# Altium PCB 数粒机发射板12通道发射板动态补光.PcbDoc
Units mil, origin at the board's own origin, x right, y up, seen from the top; angles counter-clockwise.
Board outline 12834.65 x 2362.2 mil, 4 copper layers (TopLayer, MidLayer1, MidLayer2, BottomLayer); 138 components, 115 nets, 470 pads, 68 vias.
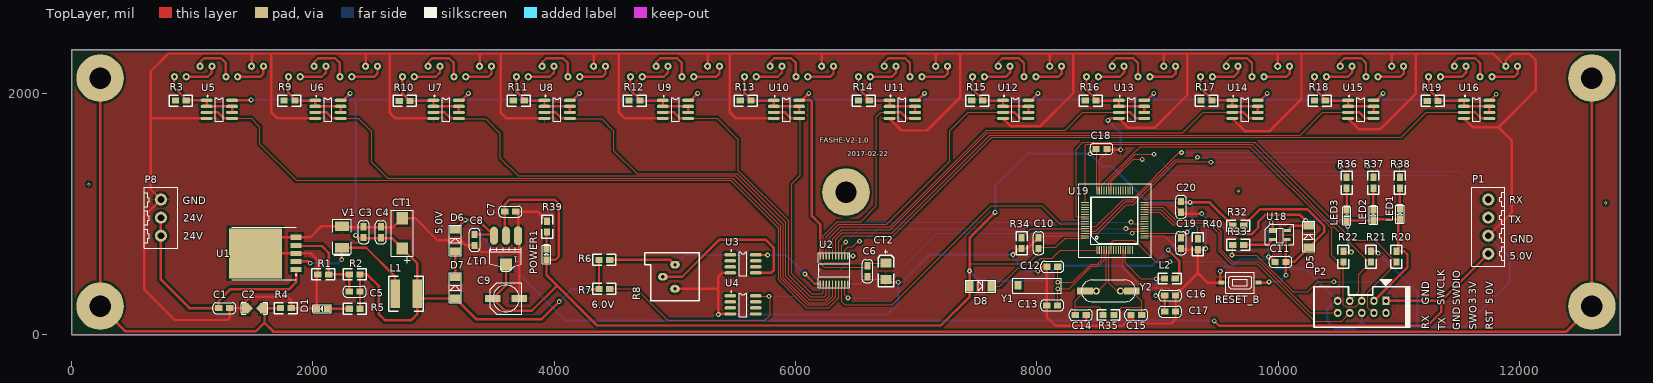
[diagram p0: TopLayer view]
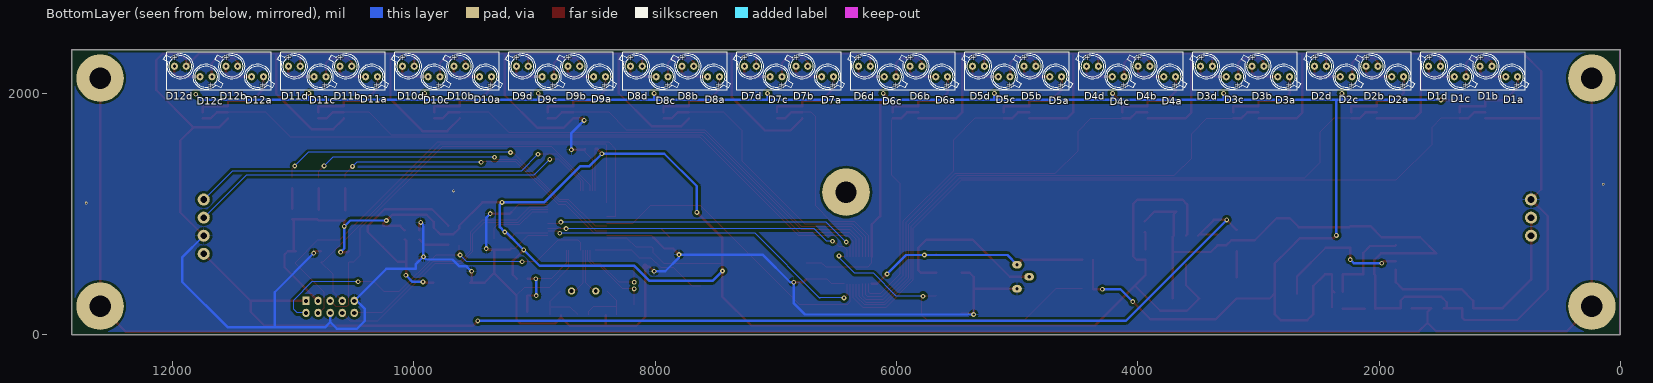
[diagram p1: BottomLayer view, seen from below]

## Layer stack, top to bottom
TopLayer: signal copper 1.4
Dielectric: core 12.6, FR-4, Dk 4.8
MidLayer1: signal copper 1.4
Dielectric: dielectric 12.6, FR-4, Dk 4.8
MidLayer2: signal copper 1.4
Dielectric: dielectric 12.6, FR-4, Dk 4.8
BottomLayer: signal copper 1.4

## Board outline
0,0 12834.65,0 12834.65,2362.2 0,2362.2

## Design rules (kind name [scope] priority, off if disabled: settings)
Clearance Clearance_1 [Inpolygon] p1: gap=20
Clearance [All] p2: gap=7.87
PolygonConnect [All] p1: connectstyle=Relief reliefconductorwidth=10 reliefentries=4 polygonreliefangle="90 Angle"
RoutingLayers [All] p1: top layer_v5=TRUE mid layer 1_v5=FALSE mid layer 2_v5=FALSE bottom layer_v5=TRUE
RoutingVias RoutingVias_1 [All] p1: holewidth=20 width=40 viastyle="Through Hole" minholewidth=20 minwidth=40 maxholewidth=20 maxwidth=40
SilkscreenOverComponentPads [All] p1: minsilkscreentomaskgap=10
SolderMaskExpansion [All] p1: expansion=4
TestPointUsage [All] p1: valid=0 allowmultiple=FALSE
Testpoint [(IsPad And (OnTopLayer Or OnBottomLayer))] p1: side=3 testpointundercomponent=TRUE minsize=40 maxsize=100 preferedsize=60 minholesize=20 maxholesize=40 preferedholesize=32 testpointgrid=1 style=297 order=0123456789
Width [All] p1: maxlimit=150 minlimit=8 preferedwidth=8
22 further rules are at their usual default settings.

## Components (designator, comment, footprint, x,y, rotation, side; value= is the part's Value field where it differs from the comment)
C1 "0.1uF" 0805C 1220,220 r0 top
C2 "102/2KV" 0805CC 1580,220 r180 top
C3 "10uF" 0805C 2420,805 r90 top
C4 "104" 0805C 2562,894 r270 top
C5 "3.3nf" 0805C 2390,356 r180 top
C6 "104" 0805C 6595,481 r90 top
C7 "104" 0805C 3680,1020 r180 top
C8 "104" 0805C 3340,740 r90 top
C9 "10SEV100M6.3X5.5" CC6.56.5 3600,300 r0 top
C10 "104" 0805C 8013,804.13 r270 top
C11 "10uf" 0805C 9973,604.13 r0 top
C12 "10p" 0805C 8083,563 r0 top
C13 "10p" 0805C 8081,243 r0 top
C14 "22p" 0805C 8408,163.13 r180 top
C15 "22p" 0805C 8779,163 r0 top
C16 "104" 0805C 9058,325 r0 top
C17 "104" 0805C 9058,191 r0 top
C18 "104" 0805C 8580,1540 r180 top
C19 "104" 0805C 9193,804.13 r270 top
C20 "104" 0805C 9193,1104.13 r270 top
CT1 "100uF/16V" CT7343 2740,840 r90 top
CT2 "10uF/16V" 3528 6748,593 r90 top
D1 "封装0805" LED-0805 2120,220 r180 top
D1a "EL-1KL3" EL-1KL3 851.38,2137.8 r0 bottom
D1b "EL-1KL3" EL-1KL3 1162.79,2224.41 r180 bottom
D1c "EL-1KL3" EL-1KL3 1278.15,2137.8 r0 bottom
D1d "EL-1KL3" EL-1KL3 1589.57,2224.41 r180 bottom
D2a "EL-1KL3" EL-1KL3 1796.26,2137.8 r0 bottom
D2b "EL-1KL3" EL-1KL3 2107.68,2224.41 r180 bottom
D2c "EL-1KL3" EL-1KL3 2223.03,2137.79 r0 bottom
D2d "EL-1KL3" EL-1KL3 2534.45,2224.41 r180 bottom
D3a "EL-1KL3" EL-1KL3 2741.14,2137.79 r0 bottom
D3b "EL-1KL3" EL-1KL3 3052.56,2224.41 r180 bottom
D3c "EL-1KL3" EL-1KL3 3167.91,2137.79 r0 bottom
D3d "EL-1KL3" EL-1KL3 3479.33,2224.41 r180 bottom
D4a "EL-1KL3" EL-1KL3 3686.02,2137.79 r0 bottom
D4b "EL-1KL3" EL-1KL3 3997.44,2224.41 r180 bottom
D4c "EL-1KL3" EL-1KL3 4112.8,2137.79 r0 bottom
D4d "EL-1KL3" EL-1KL3 4424.21,2224.41 r180 bottom
D5 "1N5822/1206" D1206 10253,724.13 r90 top
D5a "EL-1KL3" EL-1KL3 4630.9,2137.79 r0 bottom
D5b "EL-1KL3" EL-1KL3 4942.32,2224.41 r180 bottom
D5c "EL-1KL3" EL-1KL3 5057.68,2137.79 r0 bottom
D5d "EL-1KL3" EL-1KL3 5369.09,2224.41 r180 bottom
D6 "1N5822/1206" D1206 3180,691.27 r90 top
D6a "EL-1KL3" EL-1KL3 5575.79,2137.79 r0 bottom
D6b "EL-1KL3" EL-1KL3 5887.2,2224.41 r180 bottom
D6c "EL-1KL3" EL-1KL3 6002.56,2137.79 r0 bottom
D6d "EL-1KL3" EL-1KL3 6313.98,2224.41 r180 bottom
D7 "1N5822/1206" D1206 3180,300 r90 top
D7a "EL-1KL3" EL-1KL3 6520.67,2137.79 r0 bottom
D7b "EL-1KL3" EL-1KL3 6832.09,2224.41 r180 bottom
D7c "EL-1KL3" EL-1KL3 6947.44,2137.79 r0 bottom
D7d "EL-1KL3" EL-1KL3 7258.86,2224.41 r180 bottom
D8 "1N5822/1206" D1206 7444,400 r0 top
D8a "EL-1KL3" EL-1KL3 7465.55,2137.79 r0 bottom
D8b "EL-1KL3" EL-1KL3 7776.97,2224.41 r180 bottom
D8c "EL-1KL3" EL-1KL3 7892.32,2137.79 r0 bottom
D8d "EL-1KL3" EL-1KL3 8203.74,2224.41 r180 bottom
D9a "EL-1KL3" EL-1KL3 8410.43,2137.79 r0 bottom
D9b "EL-1KL3" EL-1KL3 8721.85,2224.41 r180 bottom
D9c "EL-1KL3" EL-1KL3 8837.2,2137.79 r0 bottom
D9d "EL-1KL3" EL-1KL3 9148.62,2224.41 r180 bottom
D10a "EL-1KL3" EL-1KL3 9355.31,2137.79 r0 bottom
D10b "EL-1KL3" EL-1KL3 9666.73,2224.41 r180 bottom
D10c "EL-1KL3" EL-1KL3 9782.09,2137.79 r0 bottom
D10d "EL-1KL3" EL-1KL3 10093.5,2224.41 r180 bottom
D11a "EL-1KL3" EL-1KL3 10300.2,2137.79 r0 bottom
D11b "EL-1KL3" EL-1KL3 10611.61,2224.41 r180 bottom
D11c "EL-1KL3" EL-1KL3 10726.97,2137.79 r0 bottom
D11d "EL-1KL3" EL-1KL3 11038.39,2224.41 r180 bottom
D12a "EL-1KL3" EL-1KL3 11245.08,2137.79 r0 bottom
D12b "EL-1KL3" EL-1KL3 11556.5,2224.41 r180 bottom
D12c "EL-1KL3" EL-1KL3 11671.85,2137.79 r0 bottom
D12d "EL-1KL3" EL-1KL3 11983.27,2224.41 r180 bottom
L1 "33uH2A" 6045 2680,340 r0 top
L2 "100uH" 0805 9146,465 r180 top
LED1 "封装0805" LED-0805 11012,954 r90 top
LED2 "封装0805" LED-0805 10793,945 r90 top
LED3 "封装0805" LED-0805 10572,942 r90 top
P1 "4-Pin 3.81mm" con4 11740,1120 r270 top
P2 "5X2 Pin 2.54mm" idc-10-b 10892,280 r180 top
P8 "3Pin 3.81mm" CON3 740,820 r0 top
POWER1 "封装0805" LED-0805 3940,620 r90 top
R1 "1K %1" 0805R 2040,500 r0 top
R2 "4K %1" 0805R 2300,500 r0 top
R3 "50K 1%" 0805R 860,1940 r0 top
R4 "1M" 0805R 1820,220 r180 top
R5 "10K" 0805R 2300,215 r0 top
R6 "2K" 0805R 4460,620 r180 top
R7 "2.5K" 0805R 4460,380 r180 top
R8 "3362P-1-103" VR4 5000,380 r90 top
R9 "50K 1%" 0805R 1760,1940 r0 top
R10 "50K 1%" 0805R 2714,1938 r0 top
R11 "50K 1%" 0805R 3660,1940 r0 top
R12 "50K 1%" 0805R 4620,1940 r0 top
R13 "50K 1%" 0805R 5540,1940 r0 top
R14 "50K 1%" 0805R 6520,1940 r0 top
R15 "50K 1%" 0805R 7460,1940 r0 top
R16 "50K 1%" 0805R 8400,1940 r0 top
R17 "50K 1%" 0805R 9360,1940 r0 top
R18 "50K 1%" 0805R 10300,1940 r0 top
R19 "50K 1%" 0805R 11234,1938 r0 top
R20 "10K" 0805R 10978.67,601.44 r90 top
R21 "10K" 0805R 10768.67,601.44 r90 top
R22 "10K" 0805R 10538.67,601.44 r90 top
R32 "1M" 0805R 9713,904.13 r180 top
R33 "1M" 0805R 9713,744.13 r180 top
R34 "100K" 0805R 7873,804.13 r270 top
R35 "1M" 0805R 8548,163.13 r0 top
R36 "1M" 0805R 10567,1304.01 r270 top
R37 "1M" 0805R 10787,1304.01 r270 top
R38 "1M" 0805R 11007,1304.01 r270 top
R39 "1M" 0805R 3940,940 r270 top
R40 "100K" 0805R 9333,704.13 r90 top
RESET_B "3*6*2.5 白色按钮轻触开关 两脚 2P" button_2 9530,432 r0 top
U1 "LM2596S-ADJ" TO-263 1860,540 r90 top
U2 "AD8804ARUZ" tssop20 6320,540 r90 top
U3 "LM336MX-5.0" sop8 5460,660 r0 top
U4 "LM336MX-2.5" sop8 5460,320 r0 top
U5 "TLV2472AID" sop8 1120,1940 r0 top
U6 "TLV2472AID" sop8 2020,1940 r0 top
U7 "TLV2472AID" sop8 3000,1940 r0 top
U8 "TLV2472AID" sop8 3920,1940 r0 top
U9 "TLV2472AID" sop8 4900,1940 r0 top
U10 "TLV2472AID" sop8 5820,1940 r0 top
U11 "TLV2472AID" sop8 6780,1940 r0 top
U12 "TLV2472AID" sop8 7720,1940 r0 top
U13 "TLV2472AID" sop8 8680,1940 r0 top
U14 "TLV2472AID" sop8 9620,1940 r0 top
U15 "TLV2472AID" sop8 10580,1940 r0 top
U16 "TLV2472AID" sop8 11540,1940 r0 top
U17 "AMS1117-3.3" AMS1117 3700,820 r180 top
U18 "MAX811T/SOT143" MAX811T 9953,864.13 r0 top
U19 "STM32F103RCT6" TQ64 8660,940 r90 top
V1 "SK210B" 1812DT 2240,720 r90 top
Y1 "HC-49DIP/32.768KHz" 32.768khz 8173,424.13 r180 top
Y2 "HC-49SMD/8.000MHz" CRYSTAL_SMD 8491,361 r270 top

## Footprints (in the part's own frame and the unit in brackets; to place one, negate y for a bottom-side part, rotate by r counter-clockwise, add the part's x,y. Pads: shape width x height; smd on the part's side, far side on the other; paste and mask are expansions set on the pad)
32.768khz [mm]
  round 1 hole 0.5: 1(0,-0.254) 2(0,1.143)
  rect 1.5x1.8 smd: 3(8.382,0.381)
  silkscreen extent -0.76,-1.14 9.53,2.03
0805 [mil]
  rect 60x50 smd: 1(0,-0.06) 2(90,-0.06)
  silkscreen extent -50,-45 140,45
0805C [mil]
  rect 60x50 smd: 1(0,0) 2(90,0)
  silkscreen extent -50,-45 140,45
0805CC [mil]
  rect 56x86.61 smd mask+0: 1(-10,2) 2(141,2)
  rect 56x56 smd rot 45 mask+0: 1(13,2) 2(117,2)
  silkscreen extent -44,-48 175,52
0805R [mil]
  rect 60x50 smd: 1(0,0) 2(90,0)
  silkscreen extent -50,-45 140,45
1812DT [mm]
  rect 2x3 smd: 1(4.496,0) 2(0,0)
  silkscreen extent -1.63,-1.95 5.99,1.97
3528 [mil]
  rect 75x90 smd: 1(0,0) 2(-135,0)
  silkscreen extent -195,-65 110,65
6045 [mm]
  rect 2x6 smd: 1(0,0) 2(4.699,0)
  silkscreen extent -1.27,-3.68 5.97,3.68
AMS1117 [mil]
  oct 65x150 smd: 1(0.03,-0.06)
  oval 65x150 smd: 2(100.03,-0.06) 3(200.03,-0.06)
  rect 100x100 smd: 4(100.03,239.94)
  silkscreen extent -26,100 234,293
button_2 [mm]
  rect 1.3x0.8 smd: 1(0,0) 2(7.8,0)
  silkscreen extent 0.9,-2.2 6.9,2.2
CC6.56.5 [mm]
  rect 3.2x1.5 smd: 1(-2.794,0) 2(2.8,0)
  silkscreen extent -3.3,-3.3 3.3,3.3
CON3 [mil]
  round 100 hole 56: 1(0,0) 2(0,150) 3(0,300)
  silkscreen extent -138,-102 138,402
con4 [mil]
  round 100 hole 56: 1(0,0) 2(150,0) 3(300,0) 4(450,0)
  silkscreen extent -102,-138 552,138
CRYSTAL_SMD [mil]
  rect 60x130 smd: 1(-0.46,-93.11) 2(-0.46,294.61)
  round 60 hole 32: 1(0,0) 2(-0.43,200.43)
  silkscreen extent -93,-123 88,327
CT7343 [mil]
  rect 102x95 smd: 1(-126,0) 2(126,0)
  silkscreen extent -250,-91 190,91
D1206 [mm]
  rect 1.6x2.2 smd: 1(0,0) 2(4.5,0)
  silkscreen extent -0.91,-1.24 5.46,1.27
EL-1KL3 [mm]
  round 1.5 hole 0.65: 1(0,0) 2(2.49,0)
  silkscreen extent -2.31,-2.7 3.93,2.7
idc-10-b [mil]
  rect 60x70 hole 35: 1(0,0)
  oval 60x70 hole 35: 2(0,100) 3(100,0) 4(100,100) 5(200,0) 6(200,100) 7(300,0) 8(300,100) 9(400,0) 10(400,100)
  silkscreen extent -196,-175 596,218
LED-0805 [mil]
  rect 55.12x50 smd: 1(0.99,5) 2(88,5)
  silkscreen extent -31,-30 130,40
MAX811T [mil]
  rect 63x40 smd: 1(0,0)
  rect 63x25 smd: 2(0,-75)
  rect 59.05x25 smd: 3(120,-75) 4(122.05,0)
  silkscreen extent -60,-120 175,50
sop8 [mm]
  oval 2.5x0.7 smd: 1(-0.037,0.051) 2(-0.037,-1.219) 3(-0.037,-2.489) 4(-0.037,-3.759) 5(5.32,-3.759) 6(5.32,-2.489) 7(5.32,-1.219) 8(5.32,0.051)
  silkscreen extent 0.04,-4.35 3.42,1.08
TO-263 [mil]
  rect 42x90 smd: 1(0,0) 2(66.93,0) 3(133.86,0) 4(200.79,0) 5(267.72,0)
  rect 414x440 smd: 6(133.86,336)
  silkscreen extent -85,-5 352,531
TQ64 [mm]
  rect 1.7x0.22 smd: 1(-6.062,4.151)
  oval 1.7x0.22 smd: 2(-6.062,3.651) 3(-6.062,3.151) 4(-6.062,2.651) 5(-6.062,2.151) 6(-6.062,1.651) 7(-6.062,1.151) 8(-6.062,0.651) 9(-6.062,0.151) 10(-6.062,-0.349) 11(-6.062,-0.849) 12(-6.062,-1.349) 13(-6.062,-1.849) 14(-6.062,-2.349) 15(-6.062,-2.849) 16(-6.062,-3.349) 33(6.438,-3.349) 34(6.438,-2.849) 35(6.438,-2.349) 36(6.438,-1.849) 37(6.438,-1.349) 38(6.438,-0.849) 39(6.438,-0.349) 40(6.438,0.151) 41(6.438,0.651) 42(6.438,1.151) 43(6.438,1.651) 44(6.438,2.151) 45(6.438,2.651) 46(6.438,3.151) 47(6.438,3.651) 48(6.438,4.151)
  oval 0.22x1.7 smd: 17(-3.562,-5.849) 18(-3.062,-5.849) 19(-2.562,-5.849) 20(-2.062,-5.849) 21(-1.562,-5.849) 22(-1.062,-5.849) 23(-0.562,-5.849) 24(-0.062,-5.849) 25(0.438,-5.849) 26(0.938,-5.849) 27(1.438,-5.849) 28(1.938,-5.849) 29(2.438,-5.849) 30(2.938,-5.849) 31(3.438,-5.849) 32(3.938,-5.849) 49(3.938,6.651) 50(3.438,6.651) 51(2.938,6.651) 52(2.438,6.651) 53(1.938,6.651) 54(1.438,6.651) 55(0.938,6.651) 56(0.438,6.651) 57(-0.062,6.651) 58(-0.562,6.651) 59(-1.062,6.651) 60(-1.562,6.651) 61(-2.062,6.651) 62(-2.562,6.651) 63(-3.062,6.651) 64(-3.562,6.651)
  silkscreen extent -7.59,-7.28 7.91,7.96
tssop20 [mm]
  rect 1.3x0.3 smd: 1(-2.992,2.966)
  oval 1.3x0.3 smd: 2(-2.992,2.316) 3(-2.992,1.666) 4(-2.992,1.016) 5(-2.992,0.366) 6(-2.992,-0.284) 7(-2.992,-0.934) 8(-2.992,-1.584) 9(-2.992,-2.234) 10(-2.992,-2.884) 11(2.708,-2.884) 12(2.708,-2.234) 13(2.708,-1.584) 14(2.708,-0.934) 15(2.708,-0.284) 16(2.708,0.366) 17(2.708,1.016) 18(2.708,1.666) 19(2.708,2.316) 20(2.708,2.966)
  silkscreen extent -3.85,-3.26 3.57,3.34
VR4 [mil]
  oval 62x80 hole 28: 1(0,0) 2(100,100) 3(200,0)
  silkscreen extent -100,-200 300,250

## Part data
C1 C3: library part Pro92D1.TMP_105_9
C2 C4 C5 C6 C7 C8 C10 C11 C12 C13 C14 C15 C16 C17 C18 C19 C20: library part CAP
C9: library part CAP, "10S"
CT1 CT2: library part "CAP POL"
D1: library part LED
D1a D1b D1c D1d D2a D2b D2c D2d D3a D3b D3c D3d D4a D4b D4c D4d D5a D5b D5c D5d D6a D6b D6c D6d D7a D7b D7c D7d D8a D8b D8c D8d D9a D9b D9c D9d D10a D10b D10c D10d D11a D11b D11c D11d D12a D12b D12c D12d: library part LED0
D5 D6 D7 D8: library part "DIODE 1N4148/1206", "1N58"
L1: library part Inductor
L2: library part FERRITE
LED1 LED2 LED3: library part "LED_GREEN 0805", "17-215SYGC-S530"
P1: library part "Header 4", "Header"
P2: library part "Header 5X2", "Header, 5"
P8: library part "Header 3", "Header"
POWER1: library part "LED_GREEN 0805", "17-215-SURC-S530"
R1 R2 R3 R4 R5 R6 R7 R9 R10 R11 R12 R13 R14 R15 R16 R17 R18 R19 R20 R21 R22 R32 R33 R34 R35 R36 R37 R38 R39 R40: library part Res2
R8: library part 3362P
RESET_B: library part KEY_M
U1: library part LM2575T5.0(5)
U2: library part AD8804, "12通道 8位 DAC"
U3: library part LM335MX-5.0
U4: library part LM335MX-5.0, "»"
U5 U6 U7 U8 U9 U10 U11 U12 U13 U14 U15 U16: library part AD822, "¼¯³"
U17: library part AMS1117
U18: library part "Power MAX811T"
U19: library part STM32F103RDT6
V1: library part DIODE1
Y1: library part "CRYSTAL 12M HC-49SMD", "HC-49DIP/32"
Y2: library part "CRYSTAL 12M HC-49SMD"

## Free pads (board coordinates)
  round 393.7 hole 177.17: 0(236.22,236.22) 1(236.22,2125.98) 5(12598.43,2125.98) 6(12598.43,236.22)
  round 393.7 hole 177.17 unplated: 2(6417.32,1181.1)

## Via types
v1: diameter 40, hole 20, TopLayer to BottomLayer, 65 vias
v2: diameter 23.62, hole 11.81, TopLayer to BottomLayer, 3 vias

## Nets (pads, with @x,y where several pads share a name; then routed paths per layer and width w, separated by ;. In a path a pad name is that pad's centre, name@x,y a point inside that pad or via, vN(x,y) a via of type N, cw(c..) or ccw(c..) an arc to the next point about the centre after c; other vN are vias at no path point)
ADC0: U19.16
ADC1: U19.15
ADC2: U19.14
ADC3: U19.11
ADC4: U19.10
ADC5: U19.9
ADC6: U19.8
ADC7: U19.27
ADC8: U19.26
ADC9: U19.25
ADC10: U19.24
ADC11: U19.17
BOOT0: R34.1 U19.60 | length 556
  TopLayer w8: R34.1 7947.37,878.5 U19.60
BOOT1: R40.2 U19.28 | length 588
  TopLayer w8: U19.28 9017.7,1016.3 9124,910 9308,910 9333,885 R40.2
DA1: U2.7 U5.3 U5.5 | length 6391.1
  TopLayer w10: U5.5 1488,1792 1560,1720 1560,1580 1860.38,1279.62 5460.38,1279.62 5858,882 5858,454 6088,224 6274,224 6357,307 6357,421.98 U2.7
  TopLayer w20: U5.3 1212.5,1842 1262.5,1792 U5.5
DA2: U2.6 U6.3 U6.5 | length 5509.9
  TopLayer w10: U6.5 2375,1792 2485,1682 2485,1431 2618.5,1297.5 5480.5,1297.5 5878,900 5878,465.72 6096.6,247.13 6263.13,247.13 6331.18,315.18 U2.6
  TopLayer w20: U6.3 2112.5,1842 2162.5,1792 U6.5
DA3: U2.5 U7.3 U7.5 | length 4465.8
  TopLayer w10: U7.5 3211.46,1790 3430,1790 3554,1666 3554,1461 3699.63,1315.37 5498.63,1315.37 5897,917 5897,472 6104,265 6250.28,265 6305.59,320.31 U2.5
  TopLayer w20: U7.3 3092.5,1842 3142.5,1792 U7.5
DA4: U2.4 U8.3 U8.5 | length 3475.9
  TopLayer w10: U8.5 4133.46,1788 4392,1788 4493,1687 4493,1526 4685.76,1333.24 5514.76,1333.24 5918,930 5918,483 6112,289 6249,289 6280,320 U2.4
  TopLayer w20: U8.3 4012.5,1842 4062.5,1792 U8.5
DA5: U2.3 U9.3 U9.5 | length 2502.6
  TopLayer w10: U9.5 5110.46,1793 5349,1793 5525,1617 5525,1359 5941,943 5941,494 6122,313 6236,313 6254.41,331.41 U2.3
  TopLayer w20: U9.3 4992.5,1842 5042.5,1792 U9.5
DA6: U2.2 U10.3 U10.5 | length 1957.8
  TopLayer w10: U10.5 6040,1781.46 6040,1323 5968,1251 5968,504 6132,340 6217,340 6228.82,351.82 U2.2
  TopLayer w20: U10.3 5912.5,1842 5962.5,1792 U10.5
DA7: U2.19 U11.3 U11.5 | length 1810.3
  TopLayer w10: U2.19 6228.82,818.82 6346,936 6538,936 6669,1067 6669,1806 6705,1842 U11.3
  TopLayer w20: U11.3 6872.5,1842 6922.5,1792 U11.5
DA8: U2.18 U12.3 U12.5 | length 2437.4
  TopLayer w10: U2.18 6254.41,813.41 6357,916 6757,916 7279,1438 7279,1692 7429,1842 U12.3
  TopLayer w20: U12.3 7812.5,1842 7862.5,1792 U12.5
DA9: U2.17 U13.3 U13.5 | length 3216.9
  TopLayer w10: U2.17 6280,803 6370,893 6783.72,893 7585.72,1695 8233,1695 8380,1842 U13.3
  TopLayer w20: U13.3 8772.5,1842 8822.5,1792 U13.5
DA10: U2.16 U14.3 U14.5 | length 4126.4
  TopLayer w10: U2.16 6305.59,794.59 6381,870 6786,870 7588,1672 9208,1672 9378,1842 U14.3
  TopLayer w20: U14.3 9712.5,1842 9762.5,1792 U14.5
DA11: U2.15 U15.3 U15.5 | length 5061.4
  TopLayer w10: U2.15 6331.18,789.18 6387,845 6800,845 7609,1654 10182,1654 10370,1842 U15.3
  TopLayer w20: U15.3 10672.5,1842 10722.5,1792 U15.5 U15.5@10786.82,1794.63
DA12: U2.14 U16.3 U16.5 | length 5984.2
  TopLayer w10: U2.14 6356.77,775.77 6399,818 6807,818 7624,1635 11019,1635 11226,1842 U16.3
  TopLayer w20: U16.3 11632.5,1842 11682.5,1792 U16.5
GND: C1.2 C2.2 C3.2 C4.1 C6.1 C7.1 C8.1 C9.2 C10.1 C11.1 C12.1 C13.1 C14.1 C15.1 C16.2 C17.2 C18.1 C19.2 C20.2 CT1.2 CT2.2 D1.2 D1d.2 D2d.2 D3d.2 D4d.2 D5d.2 D6d.2 D7d.2 D8d.2 D9d.2 D10d.2 D11d.2 D12d.2 P1.3 P2.6 P2.9 P8.3 R1.1 R4.1 R8.1 R21.2 R34.2 R39.1 R40.1 RESET_B.1 U1.3 U1.5 U2.10 U3.4 U4.4 U5.4 U6.4 U7.4 U8.4 U9.4 U10.4 U11.4 U12.4 U13.4 U14.4 U15.4 U16.4 U17.1 U18.1 U19.12 U19.18 U19.31 U19.47 U19.63 V1.1 | length 48757.8
  TopLayer w8: U2.10 6536.2,422.2 6572,458 CT2.2 ; C10.1 8028.32,819.45 U19.63 U19.63@8398.6,819 ; U19.47 8516.26,1449.26 8580,1513 C18.1 ; U19.12 8713.11,552.89 8875,391 9082,391 C16.2 ; U19.18 9056.55,819.45 9161.87,714.13 C19.2 ; U19.31 9131.78,1075.35 C20.2
  TopLayer w20: U5.4 655,1792 ; C2.2@1439,218 C2.2@1439,220 ; C2.2@1463,218 1461,220 C2.2@1439,220 ; D1d.2 1491.53,2329 ; 1655,2327 1655,1842 1705,1792 U6.4 ; D2d.2 2436.42,2328 ; 2635,2328 2635,1842 2685,1792 U7.4 ; D3d.2 3381.3,2327 ; C9.2 3710.24,690 ; U8.4 3605,1792 3555,1842 3555,2330 ; R39.1 3860,1020 C7.1 3699.97,1000.03 U17.1 3710.24,809.8 3710.24,690 ; D4d.2 4326.18,2328 ; 4535,2327 4535,1842 4585,1792 U9.4 ; R8.1 5355,380 5360,385 ; D5d.2 5271.06,2328 ; U4.4 5365,172 v1(5360,167) 5360,385 ; U3.4 5392,512 5360,480 5360,385 ; U10.4 5505,1792 5455,1842 5455,2330 ; D6d.2 6215.94,2329 ; CT2.2 6771,435 v1(6851,435) ; U11.4 6878.54,1692 7088,1692 7363,1967 7363,2330 ; D7d.2 7160.83,2327 ; U12.4 7781.54,1729 8029,1729 8301,2001 8301,2330 ; v1(7801,664) 7851.13,714.13 R34.2 7923,714.13 C10.1 ; v1(8008,526) 8045,563 C12.1 ; C12.1@8081,561 C13.1 8081,148 8156.13,72.87 8706.87,72.87 C15.1@8779,145 ; D8d.2 8105.71,2328 ; 8408,72.87 C14.1 ; C18.1 8588,1532 v1(8693,1532) ; v1(8588,1776) 8604,1792 U13.4 8754.54,1716 8977,1716 9245,1984 9245,2330 ; C15.1 C15.1@8779,145 ; D9d.2 9050.59,2328 ; C19.2 9203,704.13 R40.1 ; C20.2 9204.13,1003 v1(9366,1003) ; v1(9398,713) 9389.13,704.13 R40.1 ; v1(9520,525) 9520,442 RESET_B.1 9411,432 9333,510 ; U14.4 9723,1687.54 9927.54,1687.54 10192,1952 10192,2330 ; v1(9919,646) 9931.13,646 C11.1 ; v1(9942,931) 9953,920 U18.1 ; D10d.2 9995.47,2328 ; U15.4 10666.54,1704 10847,1704 11138,1995 11138,2330 ; R21.2 10812.56,691.44 v1(10828,676) ; D11d.2 10940.35,2330 ; U16.4 11612.54,1718 11825,1718 ; P1.3 11934,1014 11934,1609 11825,1718 ; 655,1792 655,1205 P8.3 601,981 601,376 855,122 1293,122 1310,139 C1.2 C2.2@1439,220 ; 655,1792 655,2183 802,2330 3555,2330 ; C2.2@1439,220 1439,269 1486,316 1787,316 1820,283 R4.1 2027,220 D1.2 2032,492 R1.1 2040,618 1984.14,673.86 U1.3 1524,673.86 1657.86,807.72 U1.5 1978.28,807.72 2067.57,897 V1.1 2247,890 2420,890 2664,890 CT1.2 2847,966 3030,783 3224,783 3267,740 C8.1 3395,685 3705.24,685 3710.24,690 ; 3555,2330 5455,2330 ; 5455,2330 7363,2330 ; 7363,2330 8301,2330 ; 8301,2330 9245,2330 ; C15.1@8779,145 8779,142 8828,93 9116,93 9148,125 C17.2 C16.2 9333,510 ; 9245,2330 10192,2330 ; 9333,510 R40.1 ; 10192,2330 10940.35,2330 ; 10940.35,2330 11138,2330 ; 11138,2330 11779.65,2330 D12d.2 11885.24,2276.24 11936,2327 12082,2327 12134,2275 12134,2027 11825,1718
  TopLayer w50: C12.1@8081,561 C12.1
  BottomLayer w20: v1(5360,167) 6756,167 6851,262 v1(6851,435) 6879,435 7108,664 v1(7801,664) 7801,640 7915,526 v1(8008,526) ; v1(8588,1776) 8693,1671 v1(8693,1532) ; v1(9366,1003) 9398,971 v1(9398,713) ; v1(9520,525) 9561,566 9621,566 9678,623 9897,623 v1@9919.5,645.5 ; v1(9919,646) v1@9919.5,645.5 ; v1(9942,931) 9920,909 9920,646 v1@9919.5,645.5 ; P2.6 10692,104 ; v1(10828,676) 11152,352 11152,60 ; P1.3 11919,641 11919,439 11540,60 11152,60 ; v1@9919.5,645.5 9984,581 9984,546 10226,546 P2.9 10471,280 10404,213 10404,116 10471,49 10637,49 10692,104 ; 10692,104 10736,60 11152,60
  other v2: 12714,1090 9669,1192 142,1247
LED1: R38.1 U19.59 | length 2990.4
  TopLayer w8: U19.59 8492.19,898.19 8714,1120 8789,1120 9179,1510 v1(9198,1510) ; v1(10986,1398) 11007,1377 R38.1
  BottomLayer w8: v1(9198,1510) 10874,1510 v1(10986,1398)
LED2: R37.1 U19.61 | length 2740.1
  TopLayer w8: U19.61 8488.82,858.82 8730,1100 8795,1100 9146,1451 9311,1451 v1(9330,1470) ; v1(10742,1399) 10787,1354 R37.1
  BottomLayer w8: v1(9330,1470) 10671,1470 v1(10742,1399)
LED3: R36.1 U19.62 | length 2487.3
  TopLayer w8: U19.62 8503.13,839.13 8740,1076 8798,1076 9156,1434 9436,1434 v1(9441,1429) ; v1(10507,1395) 10567,1335 R36.1
  BottomLayer w8: v1(9441,1429) 10473,1429 v1(10507,1395)
NetC5_2: C5.2 R1.2 R2.1 U1.4 | length 788.6
  TopLayer w20: U1.4 1865.79,735 1976,735 2074,735 2130,679 R1.2 R2.1 C5.2
NetC12_2: C12.2 U19.3 Y1.1 | length 650.2
  TopLayer w8: C12.2 Y1.1 8298.13,434.13 8448,584 8500,584 8535.95,619.95 U19.3
NetC13_2: C13.2 U19.4 Y1.2 | length 699.8
  TopLayer w8: C13.2 Y1.2@8171,377.13 ; Y1.2 8266.13,379.13 8455.13,568.13 8506.58,568.13 8556,617.55 8556,700.97 U19.4
NetC14_2: C14.2 R35.1 U19.5 Y2.1 | length 872.6
  TopLayer w8: C14.2 8318,233 ; Y2.1@8397.89,361.46 8318,281.57 8318,233 ; Y2.1@8513,364.13 8513,367 8575.32,429.32 U19.5 ; R35.1 8548,196 8511,233 8318,233
NetC15_2: C15.2 R35.2 U19.6 Y2.2 | length 908.8
  TopLayer w8: U19.6 8595,429 8659.44,364.56 Y2.2@8713.43,364.56 ; R35.2 8703.87,229 8869,229 ; Y2.2@8785.61,361.46 8869,278.07 8869,229 ; C15.2 8869,229
NetC16_1: C16.1 C17.1 L2.2 U19.13 | length 901.8
  TopLayer w8: U19.13 8732.8,594.2 8861.94,465.06 L2.2
  TopLayer w20: v1(8984,324) 8985,325 C16.1 C17.1 ; v1(8988,463) 9053.94,463 L2.2
  BottomLayer w20: v1(8984,324) 8984,459 v1(8988,463)
NetD1_1: D1.1 R5.1 | length 181
  TopLayer w20: D1.1 R5.1
NetD1a_2: D1a.2 D1b.1 | length 279.5
  TopLayer w20: D1a.2 1127.8,2137.8 1162.79,2172.79 D1b.1
NetD1b_2: D1b.2 D1c.1 | length 390.2
  TopLayer w20: D1b.2 1064.76,2257.76 1098,2291 1238,2291 1278.15,2250.85 D1c.1
NetD1c_2: D1c.2 D1d.1 | length 284.9
  TopLayer w20: D1c.2 1563.8,2137.8 1589.57,2163.57 D1d.1
NetD2a_2: D2a.2 D2b.1 | length 279.5
  TopLayer w20: D2a.2 2072.68,2137.79 2107.68,2172.79 D2b.1
NetD2b_2: D2b.2 D2c.1 | length 390.2
  TopLayer w20: D2b.2 2009.64,2257.76 2042.88,2291 2182.88,2291 2223.03,2250.85 D2c.1
NetD2c_2: D2c.2 D2d.1 | length 284.9
  TopLayer w20: D2c.2 2508.68,2137.79 2534.45,2163.57 D2d.1
NetD3a_2: D3a.2 D3b.1 | length 279.5
  TopLayer w20: D3a.2 3017.56,2137.79 3052.56,2172.79 D3b.1
NetD3b_2: D3b.2 D3c.1 | length 390.2
  TopLayer w20: D3b.2 2954.53,2257.76 2987.76,2291 3127.76,2291 3167.91,2250.85 D3c.1
NetD3c_2: D3c.2 D3d.1 | length 284.9
  TopLayer w20: D3c.2 3453.56,2137.79 3479.33,2163.57 D3d.1
NetD4a_2: D4a.2 D4b.1 | length 279.5
  TopLayer w20: D4a.2 3962.44,2137.8 3997.44,2172.8 D4b.1
NetD4b_2: D4b.2 D4c.1 | length 390.2
  TopLayer w20: D4b.2 3899.41,2257.76 3932.65,2291 4072.65,2291 4112.8,2250.85 D4c.1
NetD4c_2: D4c.2 D4d.1 | length 284.9
  TopLayer w20: D4c.2 4398.44,2137.8 4424.21,2163.57 D4d.1
NetD5a_2: D5a.2 D5b.1 | length 279.5
  TopLayer w20: D5a.2 4907.32,2137.79 4942.32,2172.79 D5b.1
NetD5b_2: D5b.2 D5c.1 | length 390.2
  TopLayer w20: D5b.2 4844.29,2257.76 4877.53,2291 5017.53,2291 5057.68,2250.85 D5c.1
NetD5c_2: D5c.2 D5d.1 | length 284.9
  TopLayer w20: D5c.2 5343.32,2137.79 5369.09,2163.57 D5d.1
NetD6_1: D6.1 D7.2 | length 214.1
  TopLayer w20: D7.2 D6.1
NetD6a_2: D6a.2 D6b.1 | length 279.5
  TopLayer w20: D6a.2 5852.21,2137.8 5887.2,2172.8 D6b.1
NetD6b_2: D6b.2 D6c.1 | length 390.2
  TopLayer w20: D6b.2 5789.17,2257.76 5822.41,2291 5962.41,2291 6002.56,2250.85 D6c.1
NetD6c_2: D6c.2 D6d.1 | length 284.9
  TopLayer w20: D6c.2 6288.21,2137.8 6313.98,2163.57 D6d.1
NetD7a_2: D7a.2 D7b.1 | length 279.5
  TopLayer w20: D7a.2 6797.09,2137.79 6832.09,2172.79 D7b.1
NetD7b_2: D7b.2 D7c.1 | length 390.2
  TopLayer w20: D7b.2 6734.05,2257.76 6767.29,2291 6907.29,2291 6947.44,2250.85 D7c.1
NetD7c_2: D7c.2 D7d.1 | length 284.9
  TopLayer w20: D7c.2 7233.09,2137.79 7258.86,2163.57 D7d.1
NetD8_2: D8.2 U19.1 | length 1000.2
  TopLayer w8: D8.2 7693,400 7846,553 7950,553 8031,634 8125,634 8192.34,701.34 U19.1
NetD8a_2: D8a.2 D8b.1 | length 279.5
  TopLayer w20: D8a.2 7741.97,2137.8 7776.97,2172.8 D8b.1
NetD8b_2: D8b.2 D8c.1 | length 390.2
  TopLayer w20: D8b.2 7678.94,2257.76 7712.17,2291 7852.17,2291 7892.32,2250.85 D8c.1
NetD8c_2: D8c.2 D8d.1 | length 284.9
  TopLayer w20: D8c.2 8177.97,2137.8 8203.74,2163.57 D8d.1
NetD9a_2: D9a.2 D9b.1 | length 279.5
  TopLayer w20: D9a.2 8686.85,2137.79 8721.85,2172.79 D9b.1
NetD9b_2: D9b.2 D9c.1 | length 390.2
  TopLayer w20: D9b.2 8623.82,2257.76 8657.06,2291 8797.06,2291 8837.2,2250.85 D9c.1
NetD9c_2: D9c.2 D9d.1 | length 284.9
  TopLayer w20: D9c.2 9122.85,2137.79 9148.62,2163.57 D9d.1
NetD10a_2: D10a.2 D10b.1 | length 279.5
  TopLayer w20: D10a.2 9631.73,2137.8 9666.73,2172.8 D10b.1
NetD10b_2: D10b.2 D10c.1 | length 390.2
  TopLayer w20: D10b.2 9568.7,2257.76 9601.94,2291 9741.94,2291 9782.09,2250.85 D10c.1
NetD10c_2: D10c.2 D10d.1 | length 284.9
  TopLayer w20: D10c.2 10067.73,2137.8 10093.5,2163.57 D10d.1
NetD11a_2: D11a.2 D11b.1 | length 279.5
  TopLayer w20: D11a.2 10576.62,2137.79 10611.61,2172.79 D11b.1
NetD11b_2: D11b.2 D11c.1 | length 390.2
  TopLayer w20: D11b.2 10513.58,2257.76 10546.82,2291 10686.82,2291 10726.97,2250.85 D11c.1
NetD11c_2: D11c.2 D11d.1 | length 284.9
  TopLayer w20: D11c.2 11012.62,2137.79 11038.39,2163.57 D11d.1
NetD12a_2: D12a.2 D12b.1 | length 279.5
  TopLayer w20: D12a.2 11521.5,2137.8 11556.5,2172.8 D12b.1
NetD12b_2: D12b.2 D12c.1 | length 390.2
  TopLayer w20: D12b.2 11458.46,2257.76 11491.7,2291 11631.7,2291 11671.85,2250.85 D12c.1
NetD12c_2: D12c.2 D12d.1 | length 284.9
  TopLayer w20: D12c.2 11957.5,2137.8 11983.27,2163.57 D12d.1
NetL1_1: L1.1 U1.2 V1.2 | length 1176
  TopLayer w20: U1.2 1963.07,606.93 v1(1978,592) ; v1(2238,622) 2238,718 V1.2 2442,720 2680,482 L1.1
  BottomLayer w20: v1(1978,592) 2208,592 v1(2238,622)
NetLED1_2: LED1.2 R38.2 | length 172
  TopLayer w20: LED1.2 R38.2
NetLED2_2: LED2.2 R37.2 | length 181.4
  TopLayer w20: R37.2 10788,1213.01 LED2.2
NetLED3_2: LED3.2 R36.2 | length 184
  TopLayer w20: LED3.2 R36.2
NetPOWER1_2: POWER1.2 R39.2 | length 144.1
  TopLayer w20: POWER1.2 3935,845 R39.2
NetR6_1: R6.1 R8.3 U2.1 U3.8 | length 1990.8
  TopLayer w20: R6.1 4960,620 R8.3 ; U3.8 5671.46,660 v1(5768,660) ; v1(6077,503) 6157.8,422.2 U2.1
  BottomLayer w20: R8.3 5080,660 v1(5768,660) 5920,660 v1(6077,503)
NetR7_1: R7.1 U2.11 U4.8 | length 2619.5
  TopLayer w10: R7.1 4680,380 4942,118 5744,118 5789,163 5789,309 v1(5779,319) 5672.46,319 U4.8 ; U2.11 6468.61,646.61 v1(6475,653)
  BottomLayer w10: v1(5779,319) 5999,319 6188,508 6344,508 6482,646 v1(6475,653)
NetR8_2: R8.2 U3.5 | length 1418
  TopLayer w20: R8.2 5060,480 5366,786 5753,786 5820,719 5820,536 5796,512 U3.5
NetR33_1: R33.1 U18.2 | length 258.6
  TopLayer w20: R33.1 9908,744.13 U18.2
PG: C2.1 pad.0 pad.1 pad.5 pad.6 R4.2 | length 16672
  TopLayer w20: pad.1 pad.0 445.44,27 1526,27 1598,99 ; R4.2 1728,218 1590,218 1567,218 1598,187 1598,99 ; pad.6 12387.2,25 1672,25 1598,99 ; pad.6@12598.43,252 pad.5@12598.43,2141.76
RESET: P2.2 R33.2 U19.7 | length 3047.4
  TopLayer w8: U19.7 8614.68,761.68 8635,782 8805.91,782 8982.91,605 v1(9102,605) ; R33.2 9623,668 v1(9615,660) 9817,660 10123,354 10242,354 10326,438 v1(10461,438)
  BottomLayer w8: v1(9102,605) 9560,605 v1(9615,660) ; v1(10461,438) 10843,438 10995,286 10995,212 10963,180 P2.2
RSTIN: C11.2 D5.1 R32.1 RESET_B.2 U18.3 | length 1806
  TopLayer w20: R32.1 9848.87,1040 10241,1040 10382,899 10382,853.13 D5.1 10133,604.13 C11.2 ; RESET_B.2 9918,432 v1(9923,437) ; v1(10065,493) 10063,495 C11.2 ; U18.3 10063,779.13 C11.2
  BottomLayer w20: v1(9923,437) 10009,437 v1(10065,493)
RX1: P1.1 U19.43 | length 3472.1
  TopLayer w8: U19.43 8595,1273.55 8816.45,1495 v1(8970,1495)
  BottomLayer w8: v1(8970,1495) 9110,1355 11505,1355 P1.1
RX3: P2.10 U19.30 | length 2054.6
  TopLayer w8: U19.30 9041.33,1055.67 9150,947 9432,947 9527,852 9527,698 9619,606 9840,606 10266,180 P2.10
SHDN: U2.8 U19.58 | length 2576.8
  TopLayer w8: U2.8 6382.36,273.64 6406,250 6801,250 7621,1070 8037.7,1070 8189.83,917.87 U19.58
SPI1_CS: U2.9 U19.20 | length 2823.5
  TopLayer w8: U2.9 6407.95,331.05 v1(6434,305) v1@6425,305 ; v1(8790,840) 8808.82,858.82 U19.20
  BottomLayer w8: v1(6434,305) 6634,305 6635,304 7171,840 v1(8790,840)
SPI1_MISO: U19.22
SPI1_MOSI: U2.13 U19.23 | length 2684.8
  TopLayer w8: U2.13 6382.36,735.36 v1(6415,768) ; v1(8779.75,933) 8794.87,917.87 U19.23
  BottomLayer w8: v1(6415,768) 6580,933 v1(8779.75,933)
SPI1_SCK: U2.12 U19.21 | length 2593.9
  TopLayer w8: U2.12 6407.95,697.95 6438,728 6472,728 v1@6515.5,771.5 ; v1(8737,879) 8737.5,878.5 U19.21
  BottomLayer w8: v1(6529,775) 6578,775 6682,879 v1(8737,879)
SWCLK: P2.7 R21.1 U19.49 | length 3644.1
  TopLayer w8: U19.49 8398.15,1565.15 8409.87,1576.87 9780.13,1576.87 10755.56,601.44 R21.1 10666,498.77 10666,354 P2.7
SWDIO: P2.5 R22.1 U19.46 | length 3237.6
  TopLayer w8: U19.46 8535.95,1236.95 8856,1557 9765,1557 10442,880 10442,660 10500.56,601.44 R22.1 10538.67,249.33 10558,230 10642,230 P2.5
SWO: P2.4 R20.1 U19.55 | length 4262.2
  TopLayer w8: U19.55 8326.07,976.93 8326.07,1538.07 8380.75,1592.75 9804.25,1592.75 10616,781 10799.11,781 R20.1 10978.67,586.67 10742,350 10742,225 10787,180 P2.4
TX1: P1.2 U19.42 | length 3478.2
  TopLayer w8: U19.42 8614.68,1270.79 8796.9,1453 v1(8872,1453)
  BottomLayer w8: v1(8872,1453) 9003,1322 11388,1322 P1.2
TX3: P2.8 U19.29 | length 2199
  TopLayer w8: U19.29 8891.29,1037 9029,1037 9139,927 9419,927 9509,837 9509,691 9612,588 9827,588 10303,112 10524,112 P2.8
VCC5V: C8.2 D6.2 P1.4 P2.1 U17.3 | length 10158.2
  TopLayer w20: D6.2 3180,869 v1(3262,951) 3369.03,951 U17.3@3490.03,830 ; C8.2 U17.3@3490.03,830 ; U17.3 U17.3@3490.03,830 ; v1(9469,114) 9509,74 11235,74 11350,189 11350,280 ; P2.1 11350,280 ; P1.4 11350,280
  BottomLayer w20: v1(3262,951) 4099,114 v1(9469,114)
VCC6: C3.1 C4.2 C5.1 C6.2 CT1.1 CT2.1 D7.1 L1.2 R2.2 R5.2 R6.2 R7.2 U2.20 U5.8 U6.8 U7.8 U8.8 U9.8 U10.8 U11.8 U12.8 U13.8 U14.8 U15.8 U16.8 | length 19141.7
  TopLayer w8: U2.20 6203.23,594.77 6239,559 6583,559 C6.2 6617,593 CT2.1
  TopLayer w20: U5.8 1483,1942 v1(1487,1946) ; U6.8@2250,1942 v1(2308,2000) ; v1(2353,823) 2376,800 2420,800 2654,800 CT1.1 2865,589 L1.2 ; C5.1@2370,350 C5.1@2380,360 ; R5.2@2390,227 C5.1 R2.2 2449,500 2544,405 2544,172 2595,121 2816,121 2865,170 L1.2 ; U7.8@3230,1942 v1(3288,2000) ; v1(4041,274) 3896,129 3351,129 D7.1 2905,300 L1.2 ; U8.8@4150,1942 v1(4208,2000) ; v1(4292,376) 4366,376 R7.2 R6.2 ; U9.8@5130,1942 v1(5188,2000) ; U10.8 U10.8@6050,1942 ; v1(6108,2000) U10.8@6050,1942 ; U2.20 6203.23,914.77 6135,983 6135,1927 6120,1942 U10.8@6050,1942 ; U11.8@7010,1942 v1(7068,2000) ; U12.8@7950,1942 v1(8008,2000) ; U13.8@8910,1942 v1(8968,2000) ; U14.8@9850,1942 v1(9908,2000) ; U15.8 10810,1942 v1(10868,2000) ; U16.8 11756,1942 v1(11806,1992)
  BottomLayer w20: v1(1487,1946) 2311,1946 ; v1(2308,2000) 2308,1949 2311,1946 ; v1(2353,823) 2353,1946 ; 3288,1949 v1(3288,2000) ; v1(4041,274) 4143,376 v1(4292,376) ; 4208,1949 v1(4208,2000) ; 5188,1949 v1(5188,2000) ; 6108,1949 v1(6108,2000) ; 7068,1949 v1(7068,2000) ; 8008,1949 v1(8008,2000) ; 8968,1949 v1(8968,2000) ; 9908,1949 v1(9908,2000) ; v1(10868,2000) 10868,1946 ; v1(11806,1992) 11760,1946 10868,1946 ; 2311,1946 2353,1946 ; 2353,1946 10868,1946
VCC24V: C1.1 P8.1 P8.2 U1.1 | length 1962.1
  TopLayer w20: P8.2 P8.1 740,456 976,220 C1.1 1220,281 1317,378 1804,378 1860,434 U1.1
VDD33V: C7.2 C9.1 C10.2 C18.2 C19.1 C20.1 D5.2 D8.1 L2.1 LED1.1 LED2.1 LED3.1 P2.3 POWER1.1 R20.2 R22.2 R32.2 U17.2 U17.4 U18.4 U19.19 U19.32 U19.48 U19.64 | length 17385.4
  TopLayer w8: 7444,589 7925,589 8013,677 C10.2 8021.87,723 8157,723 8233.76,799.76 U19.64 ; C18.2@8496.57,1540 U19.48 U19.48@8497,1193.04 ; U19.19 9158,839.13 C19.1 ; U19.32 9183.91,1095.04 9187,1098.13 C20.1
  TopLayer w20: U17.4 3599.97,409.97 C9.1 3592,198 3813,198 4021,406 4021,409 ; U17.2 3590,830.03 C7.2 3590,1080 3629,1119 4002,1119 4038,1083 4038,650 4008.99,620.99 POWER1.1 3935,495 4021,409 ; v1(7653,1013) 7444,804 7444,589 D8.1 7444,317 7203,76 4354,76 4021,409 ; v1(8440,1500) 8480,1540 C18.2 ; v1(9088,703) 9179,612 9179,498.06 L2.1 ; C20.1@9187,1098.13 9265.87,1098.13 v1(9268,1096) 9431.13,1096 R32.2 9623,881 9673,831 9779,831 9834,886 9834,935 9892,993 10179,993 v1(10226,946) 10253,919 D5.2 10112.21,901.3 U18.4 ; C19.1 9199.13,804.13 v1(9246,851) ; R22.2 10546.11,684 v1(10606,684) ; v1(10575,897) 10575,934.99 LED3.1 10570,945.99 LED2.1 10797,954.99 LED1.1 10995,942.99 10995,707.77 R20.2 11043.56,691.44 11071,664 11071,559 P2.3
  BottomLayer w20: v1(7441,528) 7523,446 8046,446 8170,570 8955,570 v1(9088,703) 9236,851 v1(9246,851) 9286,891 9286,1078 v1(9268,1096) 8920,1096 8619,1397 8543,1397 v1(8440,1500) 7923,1500 7653,1230 v1(7653,1013) ; v1(10226,946) 10526,946 v1(10575,897) 10575,715 v1(10606,684)
VOUT1: D1a.1 R3.2 U5.1 U5.2 U5.6 U5.7 | length 695.4
  TopLayer w20: D1a.1 851.38,2048.62 958,1942 U5.1 ; U5.1@1118.54,1938 U5.2 U5.7@1317.46,1892 ; U5.6 U5.7
VOUT2: D2a.1 R9.2 U6.1 U6.2 U6.6 U6.7 | length 678.5
  TopLayer w20: D2a.1 1796.26,2003.74 1860,1940 2016.54,1940 U6.1 ; U6.1@2018.54,1938 U6.2 U6.7@2217.46,1892 ; U6.6 U6.7
VOUT3: D3a.1 R10.2 U7.1 U7.2 U7.6 U7.7 | length 716.5
  TopLayer w20: D3a.1 2741.14,1998.86 2800,1940 2996.54,1940 U7.1 ; U7.1@2998.54,1938 U7.2 U7.7@3197.46,1892 ; U7.6 U7.7
VOUT4: D4a.1 R11.2 U8.1 U8.2 U8.6 U8.7 | length 682.7
  TopLayer w20: D4a.1 3686.02,2013.98 3760,1940 3916.54,1940 U8.1 ; U8.1@3918.54,1938 U8.2 U8.7@4117.46,1892 ; U8.6 U8.7
VOUT5: D5a.1 R12.2 U9.1 U9.2 U9.6 U9.7 | length 709
  TopLayer w20: D5a.1 4630.9,2029.1 4720,1940 4896.54,1940 U9.1 ; U9.1@4898.54,1938 U9.2 U9.7@5097.46,1892 ; U9.6 U9.7
VOUT6: D6a.1 R13.2 U10.1 U10.2 U10.6 U10.7 | length 698.7
  TopLayer w20: D6a.1 5575.79,2004.21 5640,1940 5816.54,1940 U10.1 ; U10.1@5818.54,1938 U10.2 U10.7@6017.46,1892 ; U10.6 U10.7
VOUT7: D7a.1 R14.2 U11.1 U11.2 U11.6 U11.7 | length 693.2
  TopLayer w20: D7a.1 6520.67,2039.33 6620,1940 6776.54,1940 U11.1 ; U11.1@6778.54,1938 U11.2 U11.7@6977.46,1892 ; U11.6 U11.7
VOUT8: D8a.1 R15.2 U12.1 U12.2 U12.6 U12.7 | length 691.2
  TopLayer w20: D8a.1 7465.55,2034.45 7560,1940 7716.54,1940 U12.1 ; U12.1@7718.54,1938 U12.2 U12.7@7917.46,1892 ; U12.6 U12.7
VOUT9: D9a.1 R16.2 U13.1 U13.2 U13.6 U13.7 | length 709.2
  TopLayer w20: D9a.1 8410.43,2029.57 8500,1940 8676.54,1940 U13.1 ; U13.1@8678.54,1938 U13.2 U13.7@8877.46,1892 ; U13.6 U13.7
VOUT10: D10a.1 R17.2 U14.1 U14.2 U14.6 U14.7 | length 695.4
  TopLayer w20: D10a.1 9355.31,2044.69 9460,1940 9462,1942 U14.1 ; U14.1@9618.54,1938 U14.2 U14.7@9817.46,1892 ; U14.6 U14.7
VOUT11: D11a.1 R18.2 U15.1 U15.2 U15.6 U15.7 | length 713.4
  TopLayer w20: D11a.1 10300.2,2039.8 10400,1940 10576.54,1940 U15.1 ; U15.1@10578.54,1938 U15.2 U15.7@10777.46,1892 ; U15.6 U15.7
VOUT12: D12a.1 R19.2 U16.1 U16.2 U16.6 U16.7 | length 751.2
  TopLayer w20: D12a.1 11245.08,2034.92 11340,1940 U16.1@11536.54,1940 ; U16.1 U16.1@11536.54,1940 ; U16.6 U16.7@11749.46,1880 ; U16.7 U16.7@11749.46,1880 ; U16.1@11536.54,1940 11538.54,1938 U16.2 11737.46,1892 U16.7@11749.46,1880
pads on no net: R3.1 R9.1 R10.1 R11.1 R12.1 R13.1 R14.1 R15.1 R16.1 R17.1 R18.1 R19.1 U1.6 U3.1 U3.2 U3.3 U3.6 U3.7 U4.1 U4.2 U4.3 U4.5 U4.6 U4.7 U19.2 U19.33 U19.34 U19.35 U19.36 U19.37 U19.38 U19.39 U19.40 U19.41 U19.44 U19.45 U19.50 U19.51 U19.52 U19.53 U19.54 U19.56 U19.57 Y1.3

## Polygon pours and split planes (outlines as drawn)
GND on TopLayer "Keep-Out Layer-No Net" (solid, remove dead copper): 0,2362.2 12834.65,2362.2 12834.65,0 0,0
GND on TopLayer "TopLayer-GND 2" (hatched 90Degree grid 20 track 20, remove dead copper, pour order 1002): 5964.67,1090.07
GND on BottomLayer "Keep-Out Layer-No Net" (solid, remove dead copper): 0,2362.2 12834.65,2362.2 12834.65,0 0,0
GND on BottomLayer "BottomLayer-GND 2" (hatched 90Degree grid 20 track 20, remove dead copper, pour order 1006): 11935.38,1639.44
GND on BottomLayer "BottomLayer-GND 3" (hatched 90Degree grid 20 track 20, remove dead copper, pour order 1007): 159.79,1014.68

## Keep-outs
KeepOutLayer:
  the board outline again, w10

## Silkscreen, mask and mechanical layers (free items; w line width, h text height)
TopOverlay:
  text "FASHE-V2-1.0" at 6199,1591 h43.31
  text "2017-02-22" at 6429,1478 h43.31
  text "RX" at 11914,1085 h60
  text "GND" at 922,1081 h60
  text "24V" at 924,935 h60
  text "TX" at 11911,924 h60
  text "5.0V" at 3076,831 h60 r90
  text "24V" at 926,787 h60
  text "GND" at 11924,763 h60
  text "5.0V" at 11920,623 h60
  text "5.0V" at 11782,252 h60 r90
  text "3.3V" at 11641,251 h60 r90
  text "GND" at 11249,249 h60 r90
  text "SWCLK" at 11381,244 h60 r90
  text "SWDIO" at 11508,243 h60 r90
  text "6.0V" at 4309,217 h60
  text "RX" at 11251,45 h60 r90
  text "SWO" at 11644,39 h60 r90
  text "RST" at 11782,39 h60 r90
  text "TX" at 11386,36 h60 r90
  text "GND" at 11506,36 h60 r90
BottomOverlay:
  lines w10: 787.4,2023.62 787.4,2338.58 1653.54,2338.58 1653.54,2023.62 787.4,2023.62 ; 1732.28,2023.62 1732.28,2338.58 2598.42,2338.58 2598.42,2023.62 1732.28,2023.62 ; 2677.16,2023.62 2677.16,2338.58 3543.31,2338.58 3543.31,2023.62 2677.16,2023.62 ; 3622.05,2023.62 3622.05,2338.58 4488.19,2338.58 4488.19,2023.62 3622.05,2023.62 ; 4566.93,2023.62 4566.93,2338.58 5433.07,2338.58 5433.07,2023.62 4566.93,2023.62 ; 5511.81,2023.62 5511.81,2338.58 6377.95,2338.58 6377.95,2023.62 5511.81,2023.62 ; 6456.69,2023.62 6456.69,2338.58 7322.83,2338.58 7322.83,2023.62 6456.69,2023.62 ; 7401.57,2023.62 7401.57,2338.58 8267.72,2338.58 8267.72,2023.62 7401.57,2023.62 ; 8346.46,2023.62 8346.46,2338.58 9212.6,2338.58 9212.6,2023.62 8346.46,2023.62 ; 9291.34,2023.62 9291.34,2338.58 10157.48,2338.58 10157.48,2023.62 9291.34,2023.62 ; 10236.22,2023.62 10236.22,2338.58 11102.36,2338.58 11102.36,2023.62 10236.22,2023.62 ; 11181.1,2023.62 11181.1,2338.58 12047.24,2338.58 12047.24,2023.62 11181.1,2023.62
Mechanical1:
  the board outline again, w10

## Text inside footprints (layer, text, board x,y; h text height)
D1a: BottomOverlay "+" at 876.38,2096.06 h47.24 r90
D1b: BottomOverlay "+" at 1137.8,2266.14 h47.24 r270
D1c: BottomOverlay "+" at 1303.15,2096.06 h47.24 r90
D1d: BottomOverlay "+" at 1564.57,2266.14 h47.24 r270
D2a: BottomOverlay "+" at 1821.26,2096.06 h47.24 r90
D2b: BottomOverlay "+" at 2082.68,2266.14 h47.24 r270
D2c: BottomOverlay "+" at 2248.03,2096.06 h47.24 r90
D2d: BottomOverlay "+" at 2509.45,2266.14 h47.24 r270
D3a: BottomOverlay "+" at 2766.14,2096.06 h47.24 r90
D3b: BottomOverlay "+" at 3027.56,2266.14 h47.24 r270
D3c: BottomOverlay "+" at 3192.91,2096.06 h47.24 r90
D3d: BottomOverlay "+" at 3454.33,2266.14 h47.24 r270
D4a: BottomOverlay "+" at 3711.02,2096.06 h47.24 r90
D4b: BottomOverlay "+" at 3972.44,2266.14 h47.24 r270
D4c: BottomOverlay "+" at 4137.8,2096.06 h47.24 r90
D4d: BottomOverlay "+" at 4399.21,2266.14 h47.24 r270
D5a: BottomOverlay "+" at 4655.9,2096.06 h47.24 r90
D5b: BottomOverlay "+" at 4917.32,2266.14 h47.24 r270
D5c: BottomOverlay "+" at 5082.68,2096.06 h47.24 r90
D5d: BottomOverlay "+" at 5344.1,2266.14 h47.24 r270
D6a: BottomOverlay "+" at 5600.79,2096.06 h47.24 r90
D6b: BottomOverlay "+" at 5862.2,2266.14 h47.24 r270
D6c: BottomOverlay "+" at 6027.56,2096.06 h47.24 r90
D6d: BottomOverlay "+" at 6288.98,2266.14 h47.24 r270
D7a: BottomOverlay "+" at 6545.67,2096.06 h47.24 r90
D7b: BottomOverlay "+" at 6807.09,2266.14 h47.24 r270
D7c: BottomOverlay "+" at 6972.44,2096.06 h47.24 r90
D7d: BottomOverlay "+" at 7233.86,2266.14 h47.24 r270
D8a: BottomOverlay "+" at 7490.55,2096.06 h47.24 r90
D8b: BottomOverlay "+" at 7751.97,2266.14 h47.24 r270
D8c: BottomOverlay "+" at 7917.32,2096.06 h47.24 r90
D8d: BottomOverlay "+" at 8178.74,2266.14 h47.24 r270
D9a: BottomOverlay "+" at 8435.43,2096.06 h47.24 r90
D9b: BottomOverlay "+" at 8696.85,2266.14 h47.24 r270
D9c: BottomOverlay "+" at 8862.2,2096.06 h47.24 r90
D9d: BottomOverlay "+" at 9123.62,2266.14 h47.24 r270
D10a: BottomOverlay "+" at 9380.31,2096.06 h47.24 r90
D10b: BottomOverlay "+" at 9641.73,2266.14 h47.24 r270
D10c: BottomOverlay "+" at 9807.09,2096.06 h47.24 r90
D10d: BottomOverlay "+" at 10068.51,2266.14 h47.24 r270
D11a: BottomOverlay "+" at 10325.2,2096.06 h47.24 r90
D11b: BottomOverlay "+" at 10586.62,2266.14 h47.24 r270
D11c: BottomOverlay "+" at 10751.97,2096.06 h47.24 r90
D11d: BottomOverlay "+" at 11013.39,2266.14 h47.24 r270
D12a: BottomOverlay "+" at 11270.08,2096.06 h47.24 r90
D12b: BottomOverlay "+" at 11531.5,2266.14 h47.24 r270
D12c: BottomOverlay "+" at 11696.85,2096.06 h47.24 r90
D12d: BottomOverlay "+" at 11958.27,2266.14 h47.24 r270
U17: TopOverlay "1" at 3705.97,647.06 h50 r180